# EAGLE board cpc_ram1m (EAGLE 6.4)
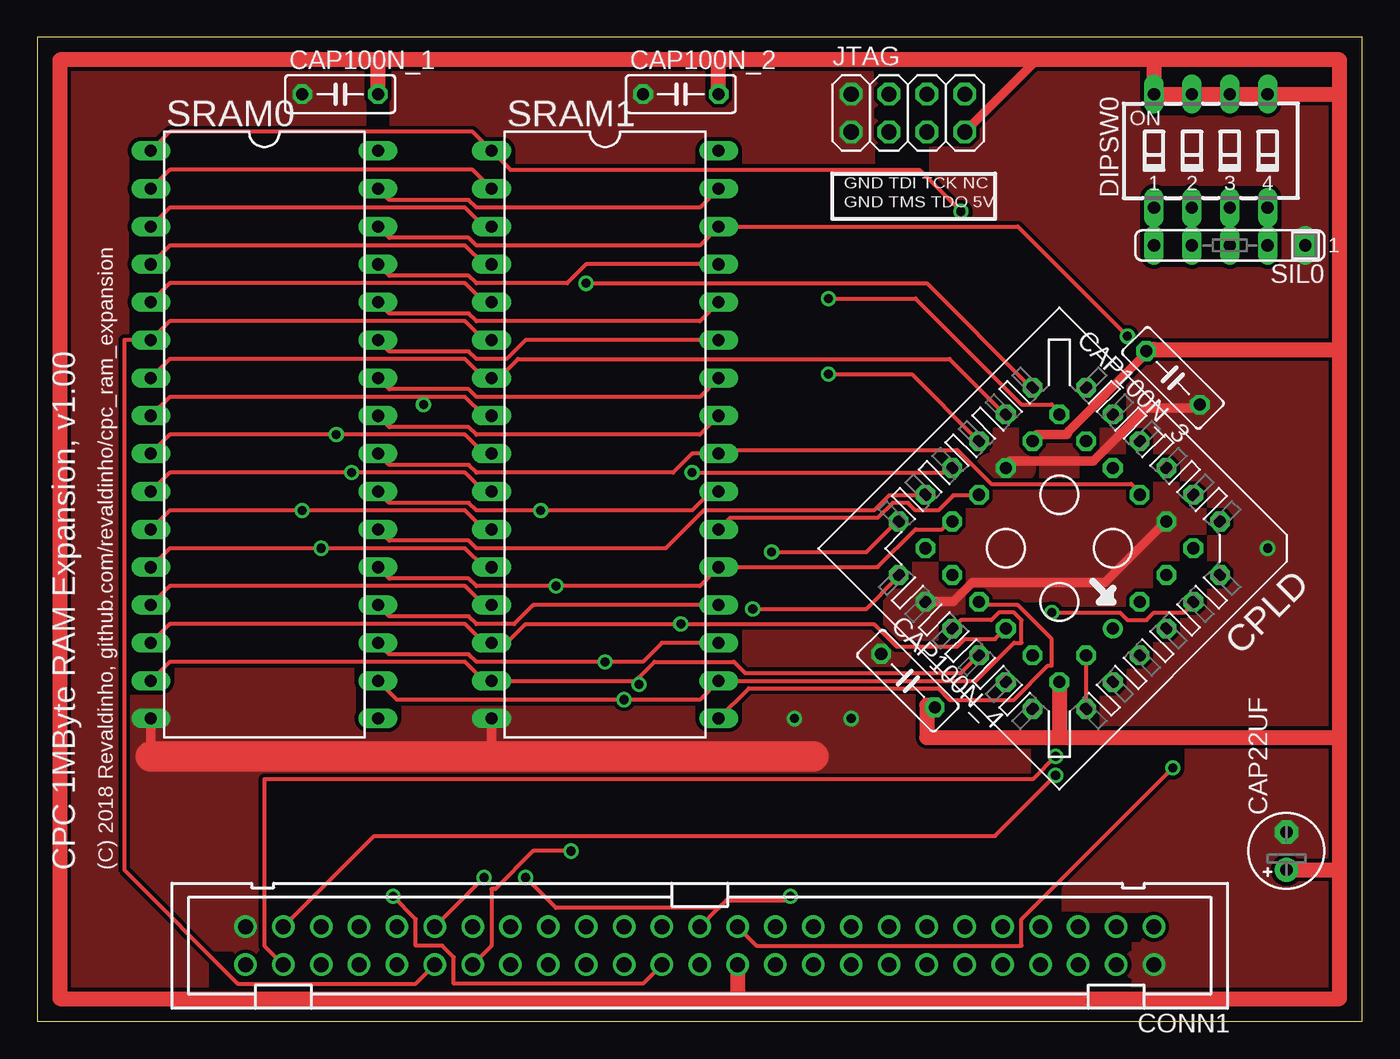
[diagram p0: board, top side]
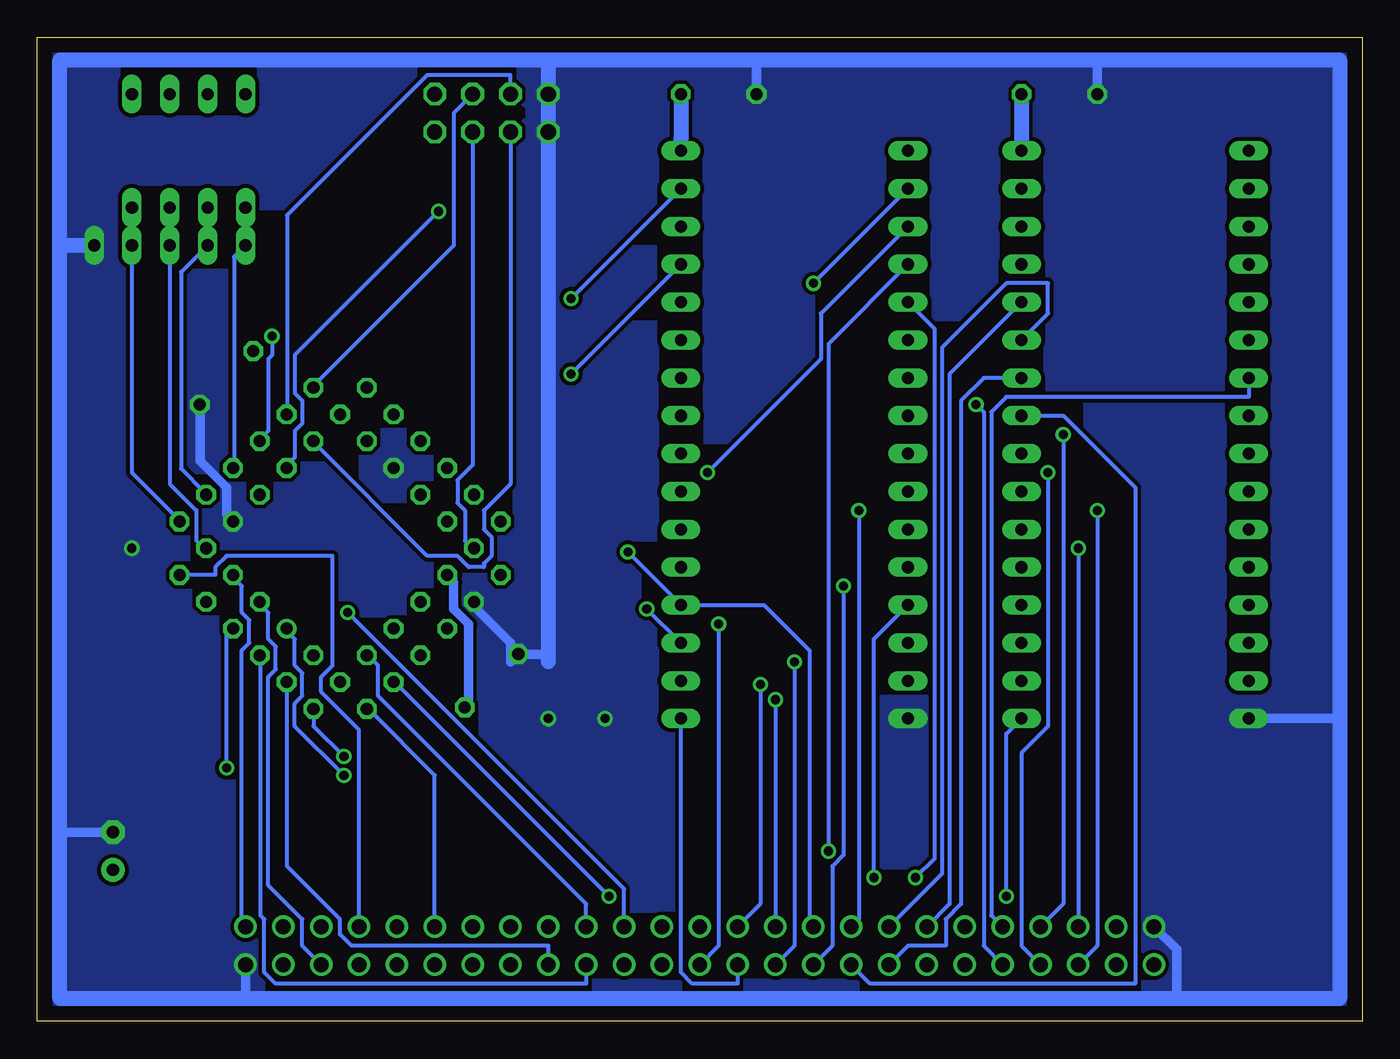
[diagram p1: board, bottom side, seen from below]

Size 88.9 x 66.04 mm. Coordinates in mm from the lower left corner, seen from the top.
Outline: 0,0 88.9,0 88.9,66.04 0,66.04 0,0
Copper layers (1*16): Top 0.035mm / dielectric 1.5mm / Bottom 0.035mm
Design rules "design_rules": minimum track width 10mil, minimum drill 24mil, track to track 10mil, track to pad 10mil, pad to pad 10mil, via to via 10mil, smd to smd 8mil, copper to edge 40mil, drill to drill 8mil, minimum pad ring 10mil, minimum via ring 8mil, stop-mask expansion 4mil, vias tented up to drill 0mil, thermal gap 10mil
Net classes: 0 signal: width 0.254 mm, clearance 0.254 mm; 1 supply: width 0.635 mm, clearance 0.254 mm

## Footprints (pad centres in the part's own frame; a part is rotated, then mirrored left to right if it is on the bottom)
E2,5-5 = drill 0.813 pad 1.6: + -1.27,0 | drill 0.813 pad 1.6 octagon: - 1.27,0
C050-025X075 = drill 0.813 octagon: 1 -2.54,0; 2 2.54,0
PAK100/2500-50 = drill 1 pad 1.422: 1 -30.48,-1.27; 2 -30.48,1.27; 3 -27.94,-1.27; 4 -27.94,1.27; 5 -25.4,-1.27; 6 -25.4,1.27; 7 -22.86,-1.27; 8 -22.86,1.27; 9 -20.32,-1.27; 10 -20.32,1.27; 11 -17.78,-1.27; 12 -17.78,1.27; 13 -15.24,-1.27; 14 -15.24,1.27; 15 -12.7,-1.27; 16 -12.7,1.27; 17 -10.16,-1.27; 18 -10.16,1.27; 19 -7.62,-1.27; 20 -7.62,1.27; 21 -5.08,-1.27; 22 -5.08,1.27; 23 -2.54,-1.27; 24 -2.54,1.27; 25 0,-1.27; 26 0,1.27; 27 2.54,-1.27; 28 2.54,1.27; 29 5.08,-1.27; 30 5.08,1.27; 31 7.62,-1.27; 32 7.62,1.27; 33 10.16,-1.27; 34 10.16,1.27; 35 12.7,-1.27; 36 12.7,1.27; 37 15.24,-1.27; 38 15.24,1.27; 39 17.78,-1.27; 40 17.78,1.27; 41 20.32,-1.27; 42 20.32,1.27; 43 22.86,-1.27; 44 22.86,1.27; 45 25.4,-1.27; 46 25.4,1.27; 47 27.94,-1.27; 48 27.94,1.27; 49 30.48,-1.27; 50 30.48,1.27
PLCC-S44-SOCKET = drill 0.813: 1 1.27,6.35 | drill 0.813 octagon: 2 -1.27,8.89; 3 -1.27,6.35; 4 -3.81,8.89; 5 -3.81,6.35; 6 -6.35,8.89; 7 -8.89,6.35; 8 -6.35,6.35; 9 -8.89,3.81; 10 -6.35,3.81; 11 -8.89,1.27; 12 -6.35,1.27; 13 -8.89,-1.27; 14 -6.35,-1.27; 15 -8.89,-3.81; 16 -6.35,-3.81; 17 -8.89,-6.35; 18 -6.35,-8.89; 19 -6.35,-6.35; 20 -3.81,-8.89; 21 -3.81,-6.35; 22 -1.27,-8.89; 23 -1.27,-6.35; 24 1.27,-8.89; 25 1.27,-6.35; 26 3.81,-8.89; 27 3.81,-6.35; 28 6.35,-8.89; 29 8.89,-6.35; 30 6.35,-6.35; 31 8.89,-3.81; 32 6.35,-3.81; 33 8.89,-1.27; 34 6.35,-1.27; 35 8.89,1.27; 36 6.35,1.27; 37 8.89,3.81; 38 6.35,3.81; 39 8.89,6.35; 40 6.35,8.89; 41 6.35,6.35; 42 3.81,8.89; 43 3.81,6.35; 44 1.27,8.89
SD4-04 = drill 0.813 long: 1 -3.81,-3.81; 2 -1.27,-3.81; 3 1.27,-3.81; 4 3.81,-3.81; 5 3.81,3.81; 6 1.27,3.81; 7 -1.27,3.81; 8 -3.81,3.81
2X04 = drill 1.016 octagon: 1 -3.81,-1.27; 2 -3.81,1.27; 3 -1.27,-1.27; 4 -1.27,1.27; 5 1.27,-1.27; 6 1.27,1.27; 7 3.81,-1.27; 8 3.81,1.27
SIL5 = drill 0.813 long: 1 -5.08,0; 2 -2.54,0; 3 0,0; 4 2.54,0; 5 5.08,0
DIL32 = drill 0.813 long: 1 -19.05,-7.62; 2 -16.51,-7.62; 3 -13.97,-7.62; 4 -11.43,-7.62; 5 -8.89,-7.62; 6 -6.35,-7.62; 7 -3.81,-7.62; 8 -1.27,-7.62; 9 1.27,-7.62; 10 3.81,-7.62; 11 6.35,-7.62; 12 8.89,-7.62; 13 11.43,-7.62; 14 13.97,-7.62; 15 16.51,-7.62; 16 19.05,-7.62; 17 19.05,7.62; 18 16.51,7.62; 19 13.97,7.62; 20 11.43,7.62; 21 8.89,7.62; 22 6.35,7.62; 23 3.81,7.62; 24 1.27,7.62; 25 -1.27,7.62; 26 -3.81,7.62; 27 -6.35,7.62; 28 -8.89,7.62; 29 -11.43,7.62; 30 -13.97,7.62; 31 -16.51,7.62; 32 -19.05,7.62

## Placement (x,y rotation side)
CAP22UF  [E2,5-5]  83.82,11.43 90 top
CAP100N_1  [C050-025X075]  20.32,62.23 0 top
CAP100N_2  [C050-025X075]  43.18,62.23 0 top
CAP100N_3  [C050-025X075]  76.2,43.18 135 top
CAP100N_4  [C050-025X075]  58.42,22.86 315 top
CONN1  [PAK100/2500-50]  44.45,5.08 180 top
CPLD  [PLCC-S44-SOCKET]  68.58,31.75 225 top
DIPSW0  [SD4-04]  78.74,58.42 0 top
JTAG  [2X04]  58.42,60.96 0 top
SIL0  [SIL5]  80.01,52.07 180 top
SRAM0  [DIL32]  15.24,39.37 270 top
SRAM1  [DIL32]  38.1,39.37 270 top

## Library data of the parts
CAP22UF CAP100N_1-CAP100N_4 = resistor
CONN1 = con-3m
CPLD SRAM0 SRAM1 = ic-package
DIPSW0 = switch-dil
JTAG = pinhead
SIL0 = resistor-sil

## Nets
A0: CONN1.33 SRAM0.23 SRAM1.23
A1: CONN1.34 SRAM0.25 SRAM1.25
A2: CONN1.35 SRAM0.27 SRAM1.27
A3: CONN1.36 SRAM0.26 SRAM1.26
A4: CONN1.37 SRAM0.28 SRAM1.28
A5: CONN1.38 SRAM0.4 SRAM1.4
A6: CONN1.39 SRAM0.5 SRAM1.5
A7: CONN1.40 SRAM0.6 SRAM1.6
A8: CONN1.41 CPLD.20 SRAM0.7 SRAM1.7
A9: CONN1.42 SRAM0.8 SRAM1.8
A10: CONN1.43 SRAM0.9 SRAM1.9
A11: CONN1.44 SRAM0.10 SRAM1.10
A12: CONN1.45 SRAM0.12 SRAM1.12
A13: CONN1.46 SRAM0.11 SRAM1.11
A14: CONN1.47 CPLD.1
A15: CONN1.48 CPLD.40 CPLD.43
BUSACK_B: CONN1.13
BUSRESET_B: CONN1.11 CPLD.39
BUSRQ_B: CONN1.14
CLK: CONN1.1 CPLD.5
CURSOR: CONN1.5
D0: CONN1.25 CPLD.37 SRAM0.13 SRAM1.13
D1: CONN1.26 CPLD.36 SRAM0.14 SRAM1.14
D2: CONN1.27 CPLD.35 SRAM0.15 SRAM1.15
D3: CONN1.28 CPLD.34 SRAM0.17 SRAM1.17
D4: CONN1.29 CPLD.33 SRAM0.18 SRAM1.18
D5: CONN1.30 CPLD.29 SRAM0.19 SRAM1.19
D6: CONN1.31 CPLD.28 SRAM0.20 SRAM1.20
D7: CONN1.32 CPLD.27 SRAM0.21 SRAM1.21
DIP0: CPLD.11 DIPSW0.1 SIL0.5
DIP1: CPLD.9 DIPSW0.2 SIL0.4
DIP2: CPLD.8 DIPSW0.3 SIL0.3
DIP3: CPLD.7 DIPSW0.4 SIL0.2
EXP_B: CONN1.3
HALT_B: CONN1.17
HIADR0: CPLD.24 SRAM0.3 SRAM1.3
HIADR1: CPLD.19 SRAM0.31 SRAM1.31
HIADR2: CPLD.18 SRAM0.2 SRAM1.2
HIADR3: CPLD.13 SRAM0.30 SRAM1.30
HIADR4: CPLD.14 SRAM0.1 SRAM1.1
INT_B: CONN1.16
IOREQ_B: CONN1.20 CPLD.44
LPEN: CONN1.4
M1_B: CONN1.22
MREQ_B: CONN1.23 CPLD.2
NMI_B: CONN1.15
RAMCS0_B: CPLD.26 SRAM0.22
RAMCS1_B: CPLD.25 SRAM1.22
RAMDIS: CONN1.6 CPLD.3
RAMOE_B: CPLD.12 SRAM0.24 SRAM1.24
RAMRD_B: CONN1.7 CPLD.6
RAMWE_B: CPLD.22 SRAM0.29 SRAM1.29
RD_B: CONN1.19 CPLD.38
READY: CONN1.12
RESET_B: CONN1.10
RFSH_B: CONN1.21 CPLD.4
ROMDIS: CONN1.8
ROMEN_B: CONN1.9
SOUND: CONN1.50
TCK: CPLD.17 JTAG.6
TDI: CPLD.15 JTAG.4
TDO: CPLD.30 JTAG.5
TMS: CPLD.16 JTAG.3
VDD [supply]: CAP22UF.+ CAP100N_1.2 CAP100N_2.2 CAP100N_3.2 CAP100N_4.2 CONN1.24 CPLD.21 CPLD.32 CPLD.41 DIPSW0.5 DIPSW0.6 DIPSW0.7 DIPSW0.8 JTAG.7 SRAM0.32 SRAM1.32
VSS [supply]: CAP22UF.- CAP100N_1.1 CAP100N_2.1 CAP100N_3.1 CAP100N_4.1 CONN1.2 CONN1.49 CPLD.10 CPLD.23 CPLD.31 JTAG.1 JTAG.2 SIL0.1 SRAM0.16 SRAM1.16
WR_B: CONN1.18 CPLD.42

## Tracks (layer width: path | path; a pad name or v marks a point on that pad's centre or on a via)
A0  (via drill 0.61)
  Top 0.254: SRAM0.23 23.62,34.8 28.96,34.8 29.46,34.29 v33.78,34.29 43.94,34.29 45.21,35.56 SRAM1.23
  Bottom 0.254: CONN1.33 33.78,6.86 v33.78,34.29
A1
  Top 0.254: SRAM0.25 23.62,39.88 28.96,39.88 29.46,39.37 44.45,39.37 SRAM1.25
  Bottom 0.254: CONN1.34 33.02,2.54 15.24,2.54 15.24,35.81 20.07,40.64 SRAM0.25
A2
  Top 0.254: SRAM0.27 23.62,44.96 28.96,44.96 29.46,44.45 31.5,44.45 32.77,45.72 SRAM1.27
  Bottom 0.254: CONN1.35 28.19,9.91 28.19,45.21 23.88,49.53 21.08,49.53 21.08,47.5 SRAM0.27
A3
  Top 0.254: SRAM0.26 23.62,42.42 28.96,42.42 29.46,41.91 44.45,41.91 SRAM1.26
  Bottom 0.254: CONN1.36 30.48,5.08 27.94,5.08 27.94,6.86 26.92,7.87 26.92,41.66 25.4,43.18 SRAM0.26
A4
  Top 0.254: SRAM0.28 23.62,47.5 28.96,47.5 29.46,46.99 44.45,46.99 SRAM1.28
  Bottom 0.254: CONN1.37 27.69,7.87 27.69,43.43 SRAM0.28
A5  (via drill 0.61)
  Top 0.254: SRAM0.4 8.89,52.07 28.7,52.07 29.97,50.8 SRAM1.4 | CONN1.38 30.48,5.08 30.48,8.89 30.73,8.89 33.27,11.43 v35.81,11.43
  Bottom 0.254: v35.81,11.43 35.81,45.47 SRAM1.4
A6  (via drill 0.61)
  Top 0.254: SRAM0.5 8.89,49.53 28.7,49.53 29.97,48.26 SRAM1.5 | v29.97,9.65 CONN1.39
  Bottom 0.254: v29.97,9.65 28.7,10.92 28.7,46.48 SRAM1.5
A7
  Top 0.254: SRAM1.6 29.97,45.72 28.7,46.99 8.89,46.99 SRAM0.6 5.84,45.72 5.84,10.16 13.46,2.54 25.4,2.54 CONN1.40
A8
  Top 0.254: SRAM0.7 8.89,44.45 28.7,44.45 29.97,43.18 SRAM1.7 30.99,43.18 32.26,44.45 61.21,44.45 64.77,40.89 CPLD.20
  Bottom 0.254: CONN1.41 24.89,7.11 24.89,40.89 23.88,41.91 7.62,41.91 SRAM0.7
A9  (via drill 0.61)
  Top 0.254: SRAM0.8 8.89,41.91 25.91,41.91 | 25.91,41.91 28.7,41.91 29.97,40.64 SRAM1.8 | 25.91,41.91 v25.91,41.4
  Bottom 0.254: CONN1.42 25.4,5.08 25.4,40.89 v25.91,41.4
A10  (via drill 0.61)
  Top 0.254: SRAM0.9 8.89,39.37 v20.07,39.37 28.7,39.37 29.97,38.1 SRAM1.9
  Bottom 0.254: CONN1.43 20.07,7.87 v20.07,39.37
A11  (via drill 0.61)
  Top 0.254: SRAM0.10 8.89,36.83 v21.08,36.83 28.7,36.83 29.97,35.56 SRAM1.10
  Bottom 0.254: CONN1.44 22.86,5.08 22.86,18.03 21.08,19.81 v21.08,36.83
A12  (via drill 0.61)
  Top 0.254: SRAM0.12 8.89,31.75 v19.05,31.75 28.7,31.75 29.97,30.48 SRAM1.12
  Bottom 0.254: v19.05,31.75 CONN1.45
A13  (via drill 0.61)
  Top 0.254: SRAM0.11 8.89,34.29 v17.78,34.29 28.7,34.29 29.97,33.02 SRAM1.11
  Bottom 0.254: CONN1.46 17.78,5.08 v17.78,34.29
A14  (via drill 0.61)
  Top 0.254: v68.33,16.51 64.26,12.45 22.61,12.45 CONN1.47
  Bottom 0.254: v68.33,16.51 71.63,19.81 71.63,21.34 71.12,21.84 71.12,23.37 71.63,23.88 71.63,25.65 72.14,26.16 CPLD.1
A15  (via drill 0.61)
  Top 0.254: CPLD.40 70.36,21.08 70.36,24.38 CPLD.43 | CONN1.48 15.24,5.08 15.24,16.26 66.8,16.26 v68.33,17.78
  Bottom 0.254: v68.33,17.78 70.36,19.81 70.36,20.83 CPLD.40
BUSRESET_B
  Bottom 0.254: CONN1.11 62.23,16.51 66.55,20.83 CPLD.39
CLK
  Bottom 0.254: CONN1.1 75.18,6.6 75.18,24.89 74.68,25.4 74.68,26.92 75.18,27.43 75.18,29.21 75.69,29.72 CPLD.5
D0  (via drill 0.61)
  Top 0.254: SRAM0.13 8.89,29.21 28.7,29.21 29.97,27.94 SRAM1.13 | v50.55,8.38 50.29,8.13 46.23,8.13 45.72,7.62 | CONN1.25 45.72,7.62 | v32.77,9.65 34.8,7.62 45.72,7.62
  Bottom 0.254: v50.55,8.38 64.77,22.61 CPLD.37 | SRAM1.13 32.77,25.65 v32.77,9.65
D1  (via drill 0.61)
  Top 0.254: SRAM0.14 8.89,26.67 28.7,26.67 29.97,25.4 SRAM1.14 31.5,25.4 32.77,26.67 v43.18,26.67 56.13,26.67 57.66,25.15 61.72,25.15 62.23,25.65 64.26,25.65 64.77,26.16 CPLD.36
  Bottom 0.254: CONN1.26 43.18,5.08 v43.18,26.67
D2  (via drill 0.61)
  Top 0.254: SRAM0.15 8.89,24.13 28.7,24.13 29.97,22.86 SRAM1.15 40.13,22.86 | 40.13,22.86 41.4,24.13 46.74,24.13 47.5,23.37 61.98,23.37 62.99,24.38 CPLD.35 | 40.13,22.86 v40.39,22.61
  Bottom 0.254: CONN1.27 40.39,7.87 v40.39,22.61
D3  (via drill 0.61)
  Top 0.254: v23.88,8.38 25.4,6.86 25.4,5.08 27.18,5.08 27.94,4.32 27.94,2.54 40.64,2.54 CONN1.28 | SRAM1.17 47.75,22.35 60.45,22.35 61.21,21.59 65.53,21.59 67.82,23.88 68.07,23.88 68.07,25.65 65.79,27.94 63.25,27.94 CPLD.34
  Bottom 0.254: SRAM0.17 23.88,19.3 v23.88,8.38 | SRAM1.17 45.72,3.3 44.96,2.54 41.91,2.54 CONN1.28
D4  (via drill 0.61)
  Top 0.254: SRAM0.18 24.13,21.59 v39.37,21.59 44.45,21.59 SRAM1.18 62.99,22.86 65.53,25.4 66.04,25.4 66.04,26.92 65.53,27.43 64.52,27.43 64.01,26.92 61.98,26.92 61.47,26.42 CPLD.33
  Bottom 0.254: v39.37,21.59 CONN1.29
D5  (via drill 0.61)
  Top 0.254: SRAM0.19 23.62,24.64 28.96,24.64 29.46,24.13 v38.1,24.13 40.64,24.13 41.91,25.4 SRAM1.19 | v48.01,27.69 55.63,27.69 57.66,29.72 CPLD.29
  Bottom 0.254: SRAM1.19 v48.01,27.69 | CONN1.30 38.1,5.08 v38.1,24.13
D6  (via drill 0.61)
  Top 0.254: SRAM0.20 23.62,27.18 28.96,27.18 29.46,26.67 32,26.67 33.27,27.94 SRAM1.20 | v49.28,31.5 55.63,31.5 57.66,33.53 CPLD.28
  Bottom 0.254: v49.28,31.5 SRAM1.20 40.13,27.94 37.08,24.89 37.08,6.6 CONN1.31
D7  (via drill 0.61)
  Top 0.254: SRAM0.21 23.62,29.72 28.96,29.72 29.46,29.21 v34.8,29.21 44.45,29.21 SRAM1.21 56.39,30.48 58.93,33.02 60.71,33.02 61.21,33.53 CPLD.27
  Bottom 0.254: CONN1.32 35.56,5.08 35.56,10.41 34.8,11.18 v34.8,29.21
DIP0
  Top 0.254: DIPSW0.1 SIL0.5
  Bottom 0.254: SIL0.5 75.69,51.31 75.69,37.34 CPLD.11
DIP1
  Top 0.254: DIPSW0.2 SIL0.4
  Bottom 0.254: SIL0.4 79.25,50.29 79.25,37.08 77.72,35.56 CPLD.9
DIP2
  Top 0.254: SIL0.3 DIPSW0.3
  Bottom 0.254: SIL0.3 80.01,36.07 78.23,34.29 78.23,32.26 77.72,31.75 CPLD.8
DIP3
  Top 0.254: SIL0.2 DIPSW0.4
  Bottom 0.254: SIL0.2 82.55,36.83 79.5,33.78 CPLD.7
HIADR0  (via drill 0.61)
  Top 0.254: SRAM0.3 8.89,54.61 28.7,54.61 29.97,53.34 SRAM1.3 | v43.94,36.83 60.96,36.83 61.21,37.08 CPLD.24
  Bottom 0.254: v43.94,36.83 36.32,44.45 36.32,47.5 SRAM1.3
HIADR1  (via drill 0.61)
  Top 0.254: SRAM0.31 23.62,55.12 28.96,55.12 29.46,54.61 44.45,54.61 SRAM1.31 | v53.09,48.51 58.93,48.51 66.04,41.4 68.07,41.4 68.58,40.89 CPLD.19
  Bottom 0.254: SRAM1.31 v53.09,48.51
HIADR2  (via drill 0.61)
  Top 0.254: SRAM0.2 8.89,57.15 29.21,57.15 SRAM1.2 | v36.83,49.53 59.69,49.53 66.55,42.67 CPLD.18
  Bottom 0.254: SRAM1.2 v36.83,49.53
HIADR3  (via drill 0.61)
  Top 0.254: SRAM0.30 23.62,52.58 28.96,52.58 29.46,52.07 44.45,52.07 SRAM1.30 65.79,53.34 v73.15,45.97
  Bottom 0.254: v73.15,45.97 73.15,44.7 73.41,44.45 73.41,39.62 73.91,39.12 CPLD.13
HIADR4  (via drill 0.61)
  Top 0.254: SRAM0.1 8.89,59.69 29.21,59.69 SRAM1.1 31.75,57.15 59.18,57.15 v61.98,54.36
  Bottom 0.254: v61.98,54.36 71.63,44.7 71.63,42.16 71.12,41.66 71.12,40.13 71.63,39.62 71.63,37.85 72.14,37.34 CPLD.14
IOREQ_B
  Bottom 0.254: CONN1.20 52.07,2.54 72.9,2.54 73.66,3.3 73.66,6.86 73.91,7.11 73.91,24.38 CPLD.44
MREQ_B  (via drill 0.61)
  Top 0.254: v76.2,17.02 66.04,6.86 66.04,5.08 48.26,5.08 CONN1.23
  Bottom 0.254: v76.2,17.02 76.2,25.91 75.95,26.16 CPLD.2
RAMCS0_B
  Top 0.254: SRAM0.22 23.62,32.26 28.96,32.26 29.46,31.75 42.16,31.75 44.7,34.29 56.13,34.29 57.15,35.31 59.44,35.31 CPLD.26
RAMCS1_B
  Top 0.254: SRAM1.22 46.48,33.78 56.39,33.78 57.4,34.8 58.42,34.8 58.93,34.29 60.45,34.29 61.47,35.31 62.99,35.31 CPLD.25
RAMDIS
  Bottom 0.254: CONN1.6 71.12,5.08 71.12,6.86 73.41,9.14 73.41,23.11 72.9,23.62 72.9,25.15 73.41,25.65 73.41,27.43 73.91,27.94 CPLD.3
RAMOE_B
  Top 0.254: SRAM0.24 23.62,37.34 28.96,37.34 29.46,36.83 42.67,36.83 43.94,38.1 SRAM1.24 45.97,38.35 61.72,38.35 64.01,36.07 73.41,36.07 73.91,35.56 CPLD.12
RAMRD_B
  Bottom 0.254: CONN1.7 67.31,19.56 69.85,22.1 69.85,23.11 69.09,23.88 69.09,31.24 76.2,31.24 76.96,30.48 76.96,29.97 79.25,29.97 CPLD.6
RAMWE_B  (via drill 0.61)
  Top 0.254: SRAM0.29 23.62,50.04 28.96,50.04 29.46,49.53 35.56,49.53 36.83,50.8 SRAM1.29 | v53.09,43.43 58.67,43.43 62.99,39.12 CPLD.22
  Bottom 0.254: SRAM1.29 v53.09,43.43
RD_B
  Bottom 0.254: CONN1.19 52.07,7.87 66.04,21.84 66.04,23.88 66.55,24.38 CPLD.38
RFSH_B  (via drill 0.61)
  Top 0.254: v68.07,27.43 72.64,27.43 73.15,26.92 74.42,26.92 74.93,27.43 76.96,27.43 77.47,27.94 CPLD.4
  Bottom 0.254: v68.07,27.43 49.53,8.89 CONN1.21
TCK
  Bottom 0.254: JTAG.6 60.96,60.96 60.96,52.07 70.36,42.67 CPLD.17
TDI
  Bottom 0.254: JTAG.4 57.15,63.5 62.74,63.5 72.14,54.1 72.14,40.89 CPLD.15
TDO
  Bottom 0.254: JTAG.5 59.69,37.34 60.71,36.32 60.71,34.8 60.2,34.29 60.2,32.26 59.69,31.75 CPLD.30
TMS
  Bottom 0.254: JTAG.3 57.15,36.07 58.93,34.29 58.93,33.02 58.42,32.51 58.42,31.24 58.93,30.73 58.93,30.48 59.94,30.48 60.71,31.24 62.74,31.24 70.36,38.86 CPLD.16
VDD
  Top 0.635: CPLD.21 66.8,39.12 67.06,39.37 69.09,39.37 69.22,39.62 74.3,44.7 74.42,44.96 CAP100N_3.2 74.68,44.96 74.93,45.09 | CAP100N_4.2 60.2,21.08 60.2,21.21 | 45.72,64.26 45.72,64.52 | JTAG.7 66.8,64.26 66.8,64.52 | 22.86,64.26 22.86,64.52
  Top 1.016: 46.99,1.52 1.52,1.52 1.52,64.52 22.86,64.52 45.72,64.52 66.8,64.52 87.38,64.52 87.38,62.23 | 46.99,1.52 87.38,1.52 87.38,10.16 | 87.38,10.16 87.38,19.05 | 87.38,19.05 87.38,45.09 | 87.38,45.09 87.38,62.23 | 60.33,21.21 60.2,21.21 59.69,21.21 59.69,19.05 68.58,19.05 | 68.58,19.05 87.38,19.05 | 74.93,45.09 87.38,45.09 | 68.58,22.86 CPLD.41 68.58,19.05 | CONN1.24 46.99,1.52 | CAP22UF.+ 87.38,10.16 | 74.93,64.26 DIPSW0.8 DIPSW0.7 DIPSW0.6 DIPSW0.5 87.38,62.23 | CAP100N_1.2 22.86,64.26 | CAP100N_2.2 45.72,64.26
  Bottom 0.635: 45.72,59.18 SRAM1.32 | CPLD.32 61.21,29.72 60.96,29.46 60.96,27.69 59.94,26.67 59.94,21.34 60.2,21.08 CAP100N_4.2
  Bottom 1.016: CAP100N_1.2 SRAM0.32 | CAP100N_2.2 45.72,59.18
VSS  (via drill 0.61)
  Top 0.635: 7.62,17.78 SRAM0.16 | 30.48,17.78 SRAM1.16 | CPLD.23 65.02,37.34 65.28,37.59 70.87,37.59 74.42,41.15 77.98,41.15 CAP100N_3.1 | CPLD.10 75.69,33.53 71.63,29.46 62.74,29.46 61.47,28.19 59.69,28.19 CPLD.31
  Top 2.032: 7.62,17.78 30.48,17.78 52.07,17.78
  Bottom 0.635: 57.15,24.13 57.15,24.64 | 57.15,24.64 57.15,25.4 59.69,27.94 CPLD.31 | CPLD.10 75.95,33.78 76.2,34.04 76.2,35.81 77.98,37.59 77.98,41.15 CAP100N_3.1 | 57.15,24.64 56.64,24.64 CAP100N_4.1 56.39,24.64 54.61,24.64 | 17.78,64.52 CAP100N_1.1 | 40.64,64.52 CAP100N_2.1 | CONN1.49 12.45,4.83 12.45,1.52 | 74.93,1.52 CONN1.2 | 87.38,12.7 CAP22UF.- | 1.52,20.32 SRAM0.16
  Bottom 1.016: 87.38,52.07 87.38,12.7 87.38,1.52 74.93,1.52 12.45,1.52 1.52,1.52 1.52,20.32 1.52,64.52 17.78,64.52 40.64,64.52 54.61,64.52 | 87.38,52.07 87.38,64.52 54.61,64.52 | 54.61,24.13 54.61,24.64 54.61,64.52 | SIL0.1 87.38,52.07
  other vias: 50.8,20.32 54.61,20.32 82.55,31.75
  pour Top: 0,0 0,66.04 88.9,66.04 88.9,0
  pour Bottom: 0,0 0,66.04 88.9,66.04 88.9,0
WR_B
  Bottom 0.254: CONN1.18 54.61,5.08 67.82,5.08 68.58,5.84 68.58,6.86 72.14,10.41 72.14,22.61 CPLD.42

## Text on the board
tPlace: GND TDI TCK NC | GND TMS TDO 5V | CPC 1MByte RAM Expansion, v1.00 | (C) 2018 Revaldinho, github.com/revaldinho/cpc_ram_expansion